# EAGLE board Purpletooth_Jamboree-Panel-v10 (EAGLE 6.5.0), part 1 of 2
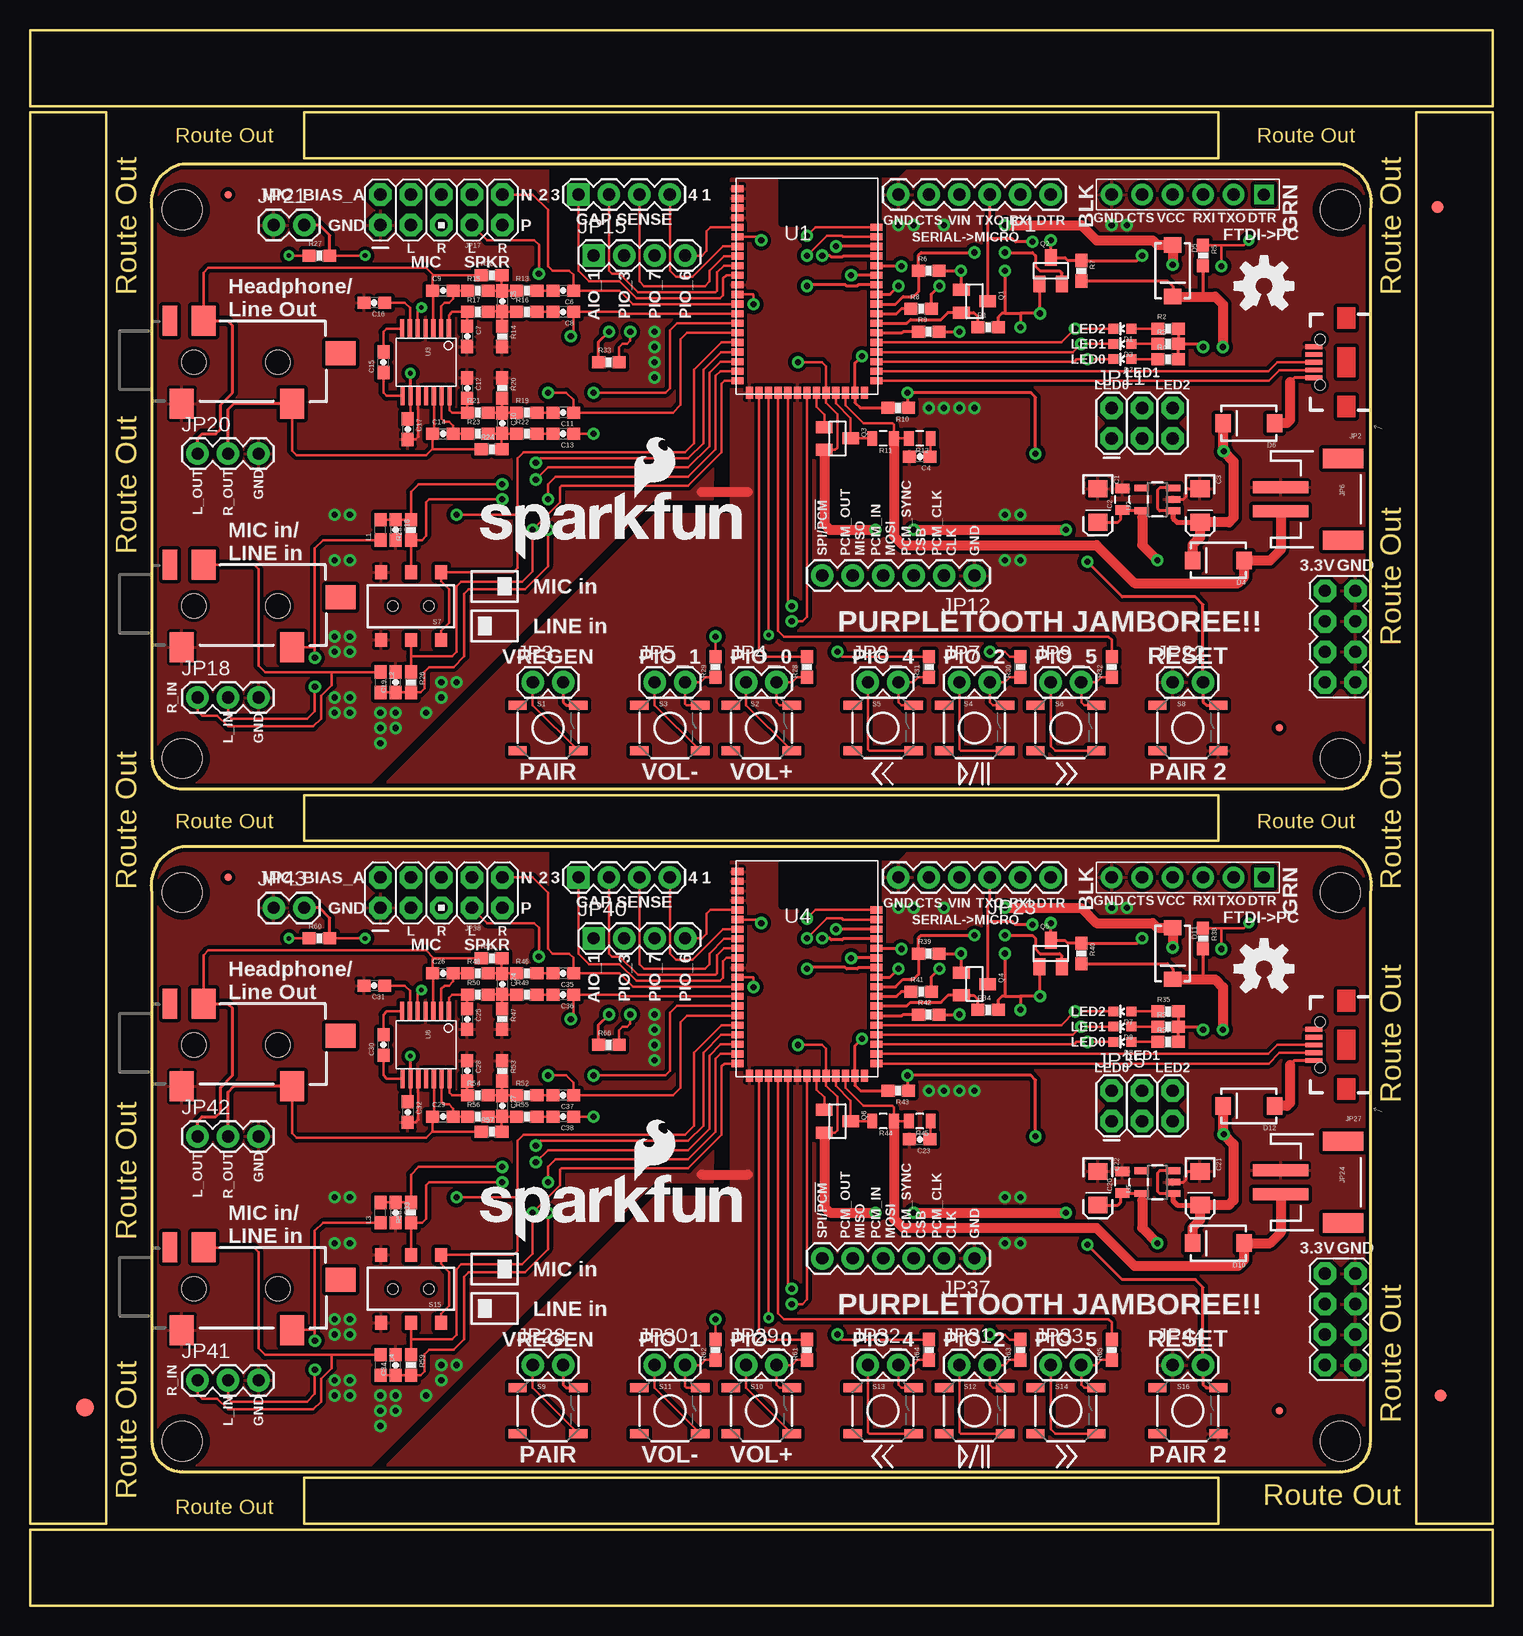
[diagram p0: board, top side]
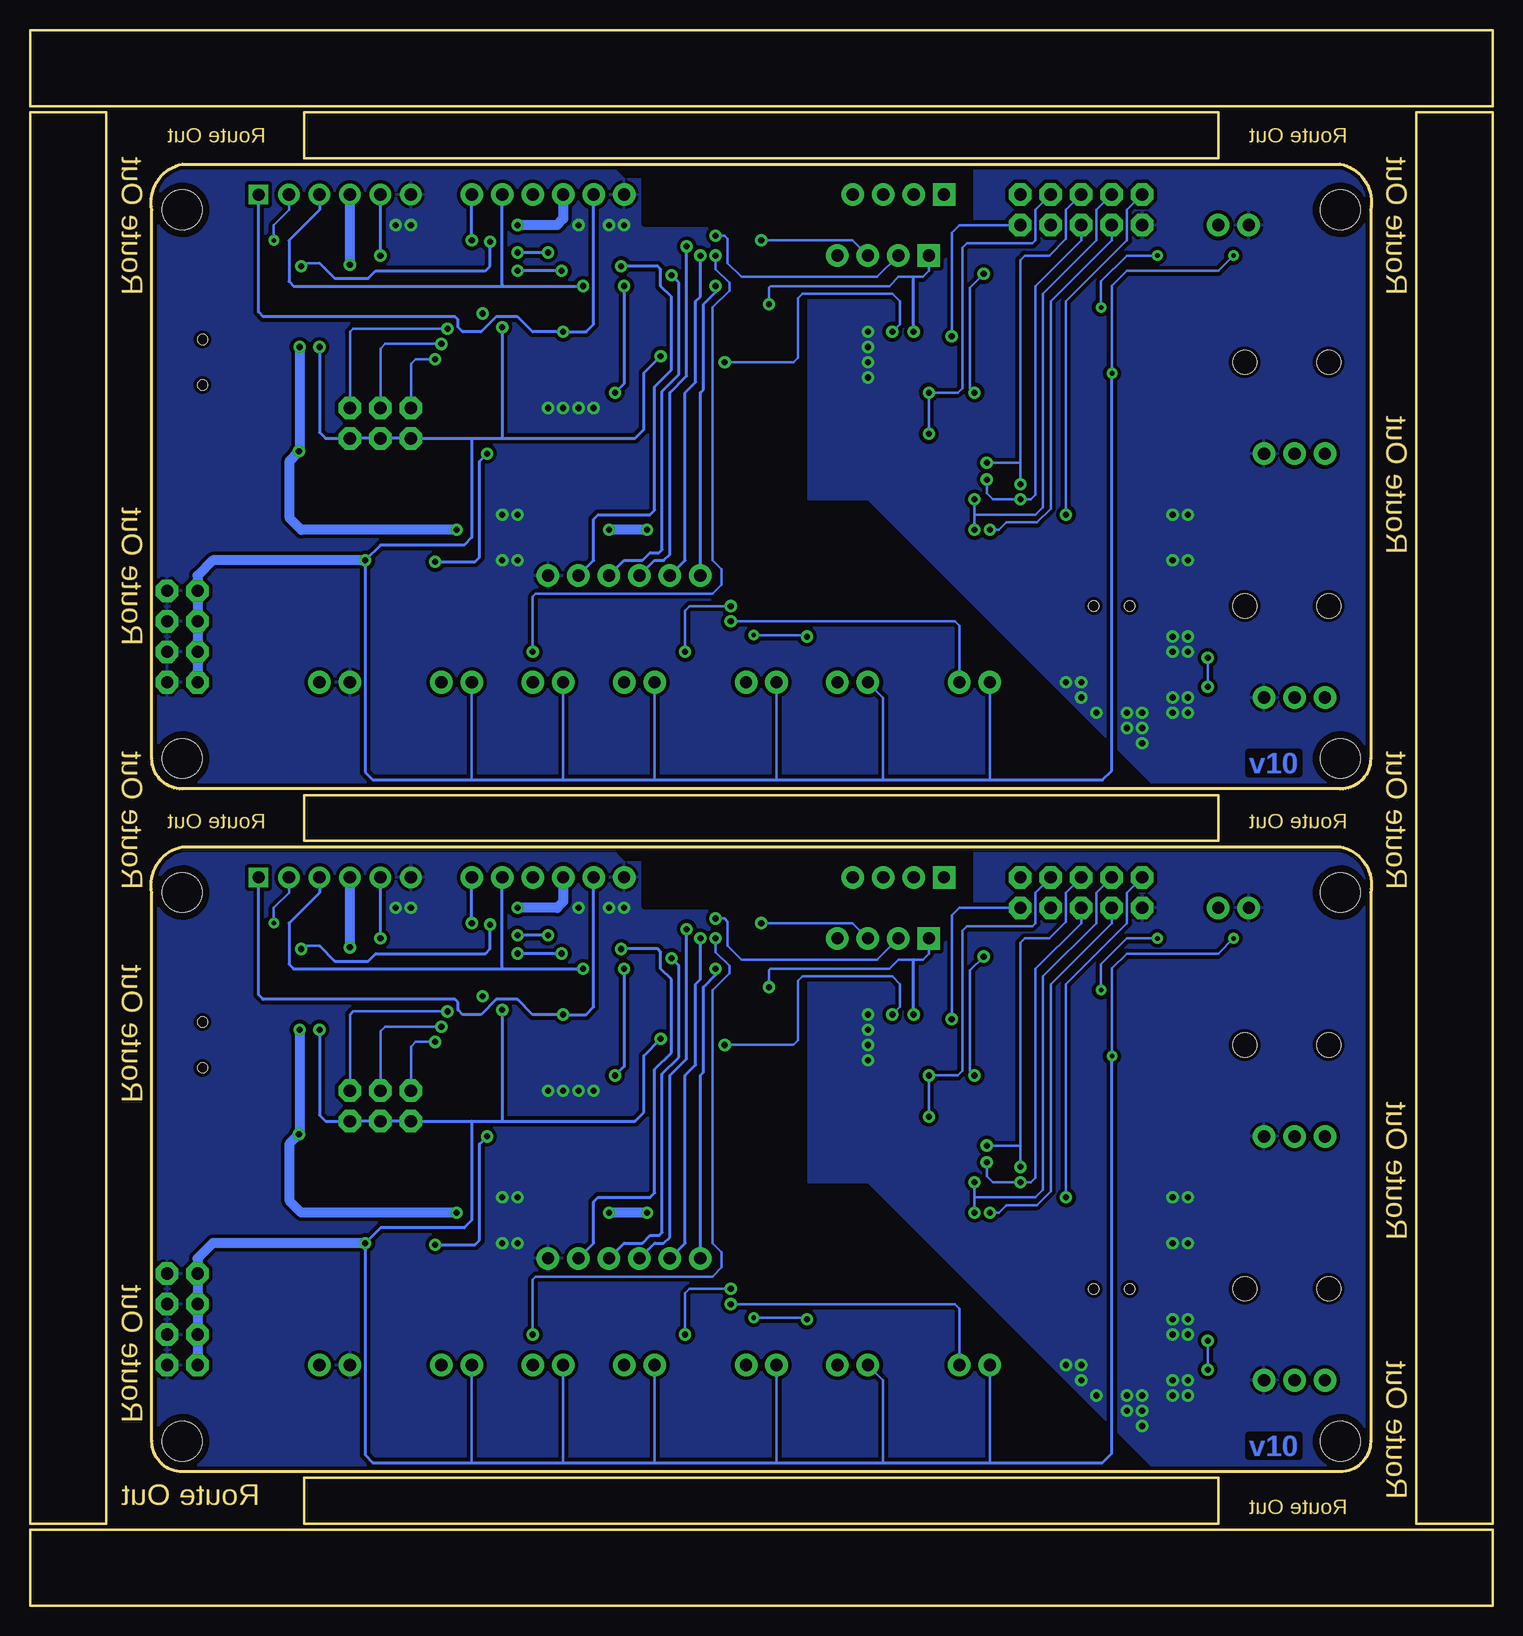
[diagram p1: board, bottom side, seen from below]

Size 121.92 x 131.32 mm. Coordinates in mm from the lower left corner, seen from the top.
Outline: 99.06,10.67 22.86,10.67 22.86,6.86 99.06,6.86 99.06,10.67
Outline: 99.06,124.46 22.86,124.46 22.86,120.65 99.06,120.65 99.06,124.46
Outline: 99.06,67.56 22.86,67.56 22.86,63.75 99.06,63.75 99.06,67.56
Outline: 121.92,131.32 0,131.32 0,124.97 121.92,124.97 121.92,131.32
Outline: 121.92,6.35 0,6.35 0,0 121.92,0 121.92,6.35
Outline: 115.57,124.46 115.57,6.86 121.92,6.86 121.92,124.46 115.57,124.46
Outline: 0,124.46 0,6.86 6.35,6.86 6.35,124.46 0,124.46
Outline: 10.16,116.33 10.16,70.61 arc90 12.7,68.07 109.22,68.07 arc90 111.76,70.61 111.76,116.33 arc90 109.22,120.14 12.7,120.14 arc90 10.16,116.33
Outline: 10.16,59.44 10.16,13.72 arc90 12.7,11.18 109.22,11.18 arc90 111.76,13.72 111.76,59.44 arc90 109.22,63.25 12.7,63.25 arc90 10.16,59.44
Copper layers (1*16): Top 0.035mm / dielectric 1.5mm / Bottom 0.035mm
Design rules "Sparkfun *": minimum track width 8mil, minimum drill 20mil, track to track 8mil, track to pad 8mil, pad to pad 8mil, via to via 8mil, smd to smd 8mil, copper to edge 8mil, drill to drill 8mil, minimum pad ring 12mil, minimum via ring 10mil, stop-mask expansion 4mil, vias tented up to drill 20mil, thermal gap 10mil

## Footprints (pad centres in the part's own frame; a part is rotated, then mirrored left to right if it is on the bottom)
EIA3216 = smd 1.4 x 1.6: A 1.4,0; C -1.4,0
0805 = smd 0.8 x 1.2: 1 -0.9,0; 2 0.9,0
0603-CAP = smd 1.1 x 1: 1 -0.85,0; 2 0.85,0
LED-0603 = smd 0.8 x 0.8: A 0,-0.75; C 0,0.75
SMA-DIODE = smd 1.27 x 1.47: A -2.15,0; C 2.15,0
FIDUCIAL-1.5X3 = smd 1.5 x 1.5: 1 0,0
FIDUCIAL-1X2 = smd 1 x 1: 1 0,0
MICRO-FIDUCIAL = smd 0.635 x 0.635: 1 0,0
FTDI_BASIC = drill 1.016 pad 1.88: CTS 10.16,0; DTR 0,0; GND 12.7,0; RXI 2.54,0; TXO 5.08,0; VCC 7.62,0
USB-AB-MICRO-SMD_V03 = smd 1.4 x 0.4: D+1 2.7,0; D-1 2.7,0.65; GND1 2.7,-1.3; ID1 2.7,-0.65; VBUS1 2.7,1.3 | hole 0.85: 2.2,1.9; 2.2,-1.9
1X02 = drill 1.016 pad 1.88: 1 0,0; 2 2.54,0
JST-2-SMD = smd 1 x 4.6: 1 -1,-3.7; 2 1,-3.7 | smd 1.6 x 3.4: NC1 -3.4,1.5; NC2 3.4,1.5
1X04 = drill 1.016 pad 1.88 square: 1 0,0 | drill 1.016 pad 1.88: 2 2.54,0; 3 5.08,0; 4 7.62,0
2X3 = drill 1.016 pad 1.88 octagon: 1 0,0; 2 0,2.54; 3 2.54,0; 4 2.54,2.54; 5 5.08,0; 6 5.08,2.54
1X06 = drill 1.016 pad 1.88: 1 0,0; 2 2.54,0; 3 5.08,0; 4 7.62,0; 5 10.16,0; 6 12.7,0
AUDIO-JACK-3.5MM-SMD = smd 2 x 2.5: RING 4.3,3.45; SLEEVE 2.5,-3.45; TIP 11.7,-3.45 | smd 1.2 x 2.5: RSH 1.5,3.45 | smd 2.5 x 2: TSH 15.75,0.75 | hole 2: 3.5,0; 10.5,0
2X4 = drill 1.016 pad 1.88 octagon: 1 -3.81,-1.27; 2 -3.81,1.27; 3 -1.27,-1.27; 4 -1.27,1.27; 5 1.27,-1.27; 6 1.27,1.27; 7 3.81,-1.27; 8 3.81,1.27
AVR_ICSP = drill 1.016 pad 1.88 octagon: 1 -1.27,5.08; 2 1.27,5.08; 3 -1.27,2.54; 4 1.27,2.54; 5 -1.27,0; 6 1.27,0; 7 -1.27,-2.54; 8 1.27,-2.54; 9 -1.27,-5.08; 10 1.27,-5.08
1X03 = drill 1.016 pad 1.88: 1 0,0; 2 2.54,0; 3 5.08,0
FTDI_DEVICE_SIDE = drill 1 square: P$1 -6.35,0 | drill 1.016 pad 1.778: P$2 -3.81,0; P$3 -1.27,0; P$4 1.27,0; P$5 3.81,0; P$6 6.35,0
0603 = smd 1.1 x 1: 1 -0.85,0; 2 0.85,0
SOT23 = smd 1 x 1.4: 1 -0.95,-1.1; 2 0.95,-1.1; 3 0,1.1
0603-RES = smd 1.1 x 1: 1 -0.85,0; 2 0.85,0
TACTILE_SWITCH_SMD = smd 1.524 x 0.762: 1 -2.54,1.905; 2 2.54,1.905; 3 -2.54,-1.905; 4 2.54,-1.905
AYZ0202 = smd 1 x 1.15: 1 -2.5,2.825; 2 0,2.825; 3 2.5,2.825; 4 -2.5,-2.825; 5 0,-2.825; 6 2.5,-2.825 | hole 0.85: 1.5,0; -1.5,0
STAND-OFF = hole 3.302: 0,0
BC127_XTRA_PASTE = smd 1 x 0.6: 1 -5.8,8.1; 2 -5.8,7.3; 3 -5.8,6.5; 4 -5.8,5.7; 5 -5.8,4.9; 6 -5.8,4.1; 7 -5.8,3.3; 8 -5.8,2.5; 9 -5.8,1.7; 10 -5.8,0.9; 11 -5.8,0.1; 12 -5.8,-0.7; 13 -5.8,-1.5; 14 -5.8,-2.3; 15 -5.8,-3.1; 16 -5.8,-3.9; 17 -5.8,-4.7; 18 -5.8,-5.5; 19 -5.8,-6.3; 20 -5.8,-7.1; 21 -5.8,-7.9; 35 5.8,-7.9; 36 5.8,-7.1; 37 5.8,-6.3; 38 5.8,-5.5; 39 5.8,-4.7; 40 5.8,-3.9; 41 5.8,-3.1; 42 5.8,-2.3; 43 5.8,-1.5; 44 5.8,-0.7; 45 5.8,0.1; 46 5.8,0.9; 47 5.8,1.7; 48 5.8,2.5; 49 5.8,3.3; 50 5.8,4.1; 51 5.8,4.9 | smd 0.6 x 1: 22 -4.8,-8.9; 23 -4,-8.9; 24 -3.2,-8.9; 25 -2.4,-8.9; 26 -1.6,-8.9; 27 -0.8,-8.9; 28 0,-8.9; 29 0.8,-8.9; 30 1.6,-8.9; 31 2.4,-8.9; 32 3.2,-8.9; 33 4,-8.9; 34 4.8,-8.9
SOT23-5 = smd 0.55 x 1.2: 1 -0.95,-1.3; 2 0,-1.3; 3 0.95,-1.3; 4 0.95,1.3; 5 -0.95,1.3
TSSOP-14 = smd 1.6 x 0.35: 1 -2.8,1.9; 2 -2.8,1.25; 3 -2.8,0.6; 4 -2.8,-0.05; 5 -2.8,-0.7; 6 -2.8,-1.35; 7 -2.8,-2; 8 2.8,-1.95; 9 2.8,-1.3; 10 2.8,-0.65; 11 2.8,0; 12 2.8,0.65; 13 2.8,1.3; 14 2.8,1.95

## Placement (x,y rotation side)
C1  10uF  [EIA3216]  89.03,91.69 270 top
C2  1uF  [0805]  91.06,92.2 90 top
C3  10uF  [EIA3216]  97.54,91.69 270 top
C4  4.7uF  [0603-CAP]  74.17,95.76 180 top
C5  180pF  [0603-CAP]  39.37,108.71 270 top
C6  0.1uF  [0603-CAP]  44.45,109.6 180 top
C7  47pF  [0603-CAP]  36.45,105.79 270 top
C8  0.1uF  [0603-CAP]  44.45,107.82 180 top
C9  47pF  [0603-CAP]  34.42,109.6 0 top
C10  180pF  [0603-CAP]  39.37,98.55 270 top
C11  0.1uF  [0603-CAP]  44.45,99.44 180 top
C12  47pF  [0603-CAP]  36.45,101.47 270 top
C13  0.1uF  [0603-CAP]  44.45,97.66 180 top
C14  47pF  [0603-CAP]  34.42,97.66 0 top
C15  1.0uF  [0603-CAP]  29.46,103.63 90 top
C16  1.0uF  [0603-CAP]  28.7,108.58 180 top
C17  1.0uF  [0603-CAP]  31.5,98.04 270 top
C18  15pF  [0603-CAP]  30.48,89.66 270 top
C19  15pF  [0603-CAP]  30.48,76.96 90 top
C20  1uF  [0805]  91.06,35.31 90 top
C21  10uF  [EIA3216]  97.54,34.8 270 top
C22  10uF  [EIA3216]  89.03,34.8 270 top
C23  4.7uF  [0603-CAP]  74.17,38.86 180 top
C24  180pF  [0603-CAP]  39.37,51.82 270 top
C25  47pF  [0603-CAP]  36.45,48.9 270 top
C26  47pF  [0603-CAP]  34.42,52.7 0 top
C27  180pF  [0603-CAP]  39.37,41.66 270 top
C28  47pF  [0603-CAP]  36.45,44.58 270 top
C29  47pF  [0603-CAP]  34.42,40.77 0 top
C30  1.0uF  [0603-CAP]  29.46,46.74 90 top
C31  1.0uF  [0603-CAP]  28.7,51.69 180 top
C32  1.0uF  [0603-CAP]  31.5,41.15 270 top
C33  15pF  [0603-CAP]  30.48,32.77 270 top
C34  15pF  [0603-CAP]  30.48,20.07 90 top
C35  0.1uF  [0603-CAP]  44.45,52.7 180 top
C36  0.1uF  [0603-CAP]  44.45,50.93 180 top
C37  0.1uF  [0603-CAP]  44.45,42.55 180 top
C38  0.1uF  [0603-CAP]  44.45,40.77 180 top
D1  GREEN  [LED-0603]  91.06,106.43 90 top
D2  RED  [LED-0603]  91.06,103.89 90 top
D3  BLUE  [LED-0603]  91.06,105.16 90 top
D4  BA340A  [SMA-DIODE]  99.06,87.12 180 top
D5  BA340A  [SMA-DIODE]  95.25,111.25 270 top
D6  BA340A  [SMA-DIODE]  101.6,98.55 180 top
D7  GREEN  [LED-0603]  91.06,49.53 90 top
D8  RED  [LED-0603]  91.06,46.99 90 top
D9  BLUE  [LED-0603]  91.06,48.26 90 top
D10  BA340A  [SMA-DIODE]  99.06,30.23 180 top
D11  BA340A  [SMA-DIODE]  95.25,54.36 270 top
D12  BA340A  [SMA-DIODE]  101.6,41.66 180 top
E$1  [FIDUCIAL-1.5X3]  4.57,16.51 0 top
E$13  [FIDUCIAL-1X2]  117.35,116.59 180 top
E$14  [FIDUCIAL-1X2]  117.6,17.53 0 top
FID1  FIDUCIALUFIDUCIAL  [MICRO-FIDUCIAL]  16.51,117.6 0 top
FID2  FIDUCIALUFIDUCIAL  [MICRO-FIDUCIAL]  104.14,73.15 0 top
FID3  FIDUCIALUFIDUCIAL  [MICRO-FIDUCIAL]  16.51,60.71 0 top
FID4  FIDUCIALUFIDUCIAL  [MICRO-FIDUCIAL]  104.14,16.26 0 top
JP1  FTDI_BASICPTH  [FTDI_BASIC]  85.09,117.6 180 top
JP2  [USB-AB-MICRO-SMD_V03]  109.73,103.63 180 top
JP3  M02PTH  [1X02]  41.91,76.96 0 top
JP4  M02PTH  [1X02]  59.69,76.96 0 top
JP5  M02PTH  [1X02]  52.07,76.96 0 top
JP6  M02-JST-2MM-SMT  [JST-2-SMD]  107.95,92.2 270 top
JP7  M02PTH  [1X02]  77.47,76.96 0 top
JP8  M02PTH  [1X02]  69.85,76.96 0 top
JP9  M02PTH  [1X02]  85.09,76.96 0 top
JP10  [1X04]  45.72,117.6 0 top
JP11  [2X3]  90.17,97.28 0 top
JP12  [1X06]  78.74,85.85 180 top
JP13  AUDIO-JACK2SMD  [AUDIO-JACK-3.5MM-SMD]  10.16,103.63 0 top
JP14  AUDIO-JACK2SMD  [AUDIO-JACK-3.5MM-SMD]  10.16,83.31 0 top
JP15  [1X04]  46.99,112.52 0 top
JP16  M04X2  [2X4]  109.22,80.77 270 top
JP17  M05X2PTH  [AVR_ICSP]  34.29,116.33 90 top
JP18  [1X03]  13.97,75.69 0 top
JP19  FTDI_DEVICE  [FTDI_DEVICE_SIDE]  96.52,117.6 180 top
JP20  [1X03]  13.97,96.01 0 top
JP21  M02PTH  [1X02]  20.32,115.06 0 top
JP22  M02PTH  [1X02]  95.25,76.96 0 top
JP23  FTDI_BASICPTH  [FTDI_BASIC]  85.09,60.71 180 top
JP24  M02-JST-2MM-SMT  [JST-2-SMD]  107.95,35.31 270 top
JP25  AUDIO-JACK2SMD  [AUDIO-JACK-3.5MM-SMD]  10.16,46.74 0 top
JP26  AUDIO-JACK2SMD  [AUDIO-JACK-3.5MM-SMD]  10.16,26.42 0 top
JP27  [USB-AB-MICRO-SMD_V03]  109.73,46.74 180 top
JP28  M02PTH  [1X02]  41.91,20.07 0 top
JP29  M02PTH  [1X02]  59.69,20.07 0 top
JP30  M02PTH  [1X02]  52.07,20.07 0 top
JP31  M02PTH  [1X02]  77.47,20.07 0 top
JP32  M02PTH  [1X02]  69.85,20.07 0 top
JP33  M02PTH  [1X02]  85.09,20.07 0 top
JP34  [1X04]  45.72,60.71 0 top
JP35  [2X3]  90.17,40.39 0 top
JP36  M04X2  [2X4]  109.22,23.88 270 top
JP37  [1X06]  78.74,28.96 180 top
JP38  M05X2PTH  [AVR_ICSP]  34.29,59.44 90 top
JP39  FTDI_DEVICE  [FTDI_DEVICE_SIDE]  96.52,60.71 180 top
JP40  [1X04]  46.99,55.63 0 top
JP41  [1X03]  13.97,18.8 0 top
JP42  [1X03]  13.97,39.12 0 top
JP43  M02PTH  [1X02]  20.32,58.17 0 top
JP44  M02PTH  [1X02]  95.25,20.07 0 top
L1  15nH  [0603]  29.21,89.66 90 top
L2  15nH  [0603]  29.21,76.96 270 top
L3  15nH  [0603]  29.21,32.77 90 top
L4  15nH  [0603]  29.21,20.07 270 top
LOGO1  OSHW-LOGOM  [OSHW-LOGO-M]  102.87,109.98 0 top
LOGO2  SFE_LOGO_NAME_FLAME.2_INCH  [SFE_LOGO_NAME_FLAME_.2]  36.83,87.12 0 top
LOGO3  OSHW-LOGOM  [OSHW-LOGO-M]  102.87,53.09 0 top
LOGO4  SFE_LOGO_NAME_FLAME.2_INCH  [SFE_LOGO_NAME_FLAME_.2]  36.83,30.23 0 top
Q1  MOSFET-NCHANNELBSS138  [SOT23]  78.74,108.71 270 top
Q2  MOSFET-NCHANNELBSS138  [SOT23]  85.09,111.25 0 top
Q3  MMBT4403  [SOT23]  67.31,97.28 270 top
Q4  MOSFET-NCHANNELBSS138  [SOT23]  78.74,51.82 270 top
Q5  MOSFET-NCHANNELBSS138  [SOT23]  85.09,54.36 0 top
Q6  MMBT4403  [SOT23]  67.31,40.39 270 top
R1  10K  [0603-RES]  79.88,106.55 0 top
R2  240  [0603-RES]  94.87,106.43 0 top
R3  240  [0603-RES]  94.87,105.16 0 top
R4  240  [0603-RES]  94.87,103.89 0 top
R5  10K  [0603-RES]  97.79,112.52 270 top
R6  10K  [0603-RES]  74.93,111.25 0 top
R7  10K  [0603-RES]  87.63,111.25 270 top
R8  10K  [0603-RES]  74.3,108.08 0 top
R9  10K  [0603-RES]  74.93,106.17 0 top
R10  10K  [0603-RES]  72.39,99.82 180 top
R11  0.75  [0805]  71.12,97.28 180 top
R12  0.22  [0805]  74.17,97.28 180 top
R13  15K  [0603-RES]  41.4,109.6 0 top
R14  30.1k  [0603-RES]  39.37,105.79 270 top
R15  43k  [0603-RES]  37.34,109.6 0 top
R16  15K  [0603-RES]  41.4,107.82 0 top
R17  43k  [0603-RES]  37.34,107.82 0 top
R18  30.1k  [0603-RES]  38.48,110.87 0 top
R19  15K  [0603-RES]  41.4,99.44 0 top
R20  30.1k  [0603-RES]  39.37,101.47 270 top
R21  43k  [0603-RES]  37.34,99.44 0 top
R22  15K  [0603-RES]  41.4,97.66 0 top
R23  43k  [0603-RES]  37.34,97.66 0 top
R24  30.1k  [0603-RES]  38.48,96.39 0 top
R25  2.2k  [0603-RES]  31.75,89.66 90 top
R26  2.2k  [0603-RES]  31.75,76.96 270 top
R27  10K  [0603-RES]  24.13,112.52 0 top
R28  2.2k  [0603-RES]  64.77,78.23 90 top
R29  2.2k  [0603-RES]  57.15,78.23 90 top
R30  2.2k  [0603-RES]  82.55,78.23 90 top
R31  2.2k  [0603-RES]  74.93,78.23 90 top
R32  2.2k  [0603-RES]  90.17,78.23 90 top
R33  10K  [0603-RES]  48.26,103.63 0 top
R34  10K  [0603-RES]  79.88,49.66 0 top
R35  240  [0603-RES]  94.87,49.53 0 top
R36  240  [0603-RES]  94.87,48.26 0 top
R37  240  [0603-RES]  94.87,46.99 0 top
R38  10K  [0603-RES]  97.79,55.63 270 top
R39  10K  [0603-RES]  74.93,54.36 0 top
R40  10K  [0603-RES]  87.63,54.36 270 top
R41  10K  [0603-RES]  74.3,51.18 0 top
R42  10K  [0603-RES]  74.93,49.28 0 top
R43  10K  [0603-RES]  72.39,42.93 180 top
R44  0.75  [0805]  71.12,40.39 180 top
R45  0.22  [0805]  74.17,40.39 180 top
R46  15K  [0603-RES]  41.4,52.7 0 top
R47  30.1k  [0603-RES]  39.37,48.9 270 top
R48  43k  [0603-RES]  37.34,52.7 0 top
R49  15K  [0603-RES]  41.4,50.93 0 top
R50  43k  [0603-RES]  37.34,50.93 0 top
R51  30.1k  [0603-RES]  38.48,53.98 0 top
R52  15K  [0603-RES]  41.4,42.55 0 top
R53  30.1k  [0603-RES]  39.37,44.58 270 top
R54  43k  [0603-RES]  37.34,42.55 0 top
R55  15K  [0603-RES]  41.4,40.77 0 top
R56  43k  [0603-RES]  37.34,40.77 0 top
R57  30.1k  [0603-RES]  38.48,39.5 0 top
R58  2.2k  [0603-RES]  31.75,32.77 90 top
R59  2.2k  [0603-RES]  31.75,20.07 270 top
R60  10K  [0603-RES]  24.13,55.63 0 top
R61  2.2k  [0603-RES]  64.77,21.34 90 top
R62  2.2k  [0603-RES]  57.15,21.34 90 top
R63  2.2k  [0603-RES]  82.55,21.34 90 top
R64  2.2k  [0603-RES]  74.93,21.34 90 top
R65  2.2k  [0603-RES]  90.17,21.34 90 top
R66  10K  [0603-RES]  48.26,46.74 0 top
S1  [TACTILE_SWITCH_SMD]  43.18,73.15 0 top
S2  [TACTILE_SWITCH_SMD]  60.96,73.15 0 top
S3  [TACTILE_SWITCH_SMD]  53.34,73.15 0 top
S4  [TACTILE_SWITCH_SMD]  78.74,73.15 0 top
S5  [TACTILE_SWITCH_SMD]  71.12,73.15 0 top
S6  [TACTILE_SWITCH_SMD]  86.36,73.15 0 top
S7  DPDT  [AYZ0202]  31.75,83.31 180 top
S8  [TACTILE_SWITCH_SMD]  96.52,73.15 0 top
S9  [TACTILE_SWITCH_SMD]  43.18,16.26 0 top
S10  [TACTILE_SWITCH_SMD]  60.96,16.26 0 top
S11  [TACTILE_SWITCH_SMD]  53.34,16.26 0 top
S12  [TACTILE_SWITCH_SMD]  78.74,16.26 0 top
S13  [TACTILE_SWITCH_SMD]  71.12,16.26 0 top
S14  [TACTILE_SWITCH_SMD]  86.36,16.26 0 top
S15  DPDT  [AYZ0202]  31.75,26.42 180 top
S16  [TACTILE_SWITCH_SMD]  96.52,16.26 0 top
STANDOFF1  STAND-OFF  [STAND-OFF]  109.22,116.33 0 top
STANDOFF2  STAND-OFF  [STAND-OFF]  109.22,70.61 0 top
STANDOFF3  STAND-OFF  [STAND-OFF]  12.7,70.61 0 top
STANDOFF4  STAND-OFF  [STAND-OFF]  12.7,116.33 0 top
STANDOFF5  STAND-OFF  [STAND-OFF]  109.22,59.44 0 top
STANDOFF6  STAND-OFF  [STAND-OFF]  109.22,13.72 0 top
STANDOFF7  STAND-OFF  [STAND-OFF]  12.7,13.72 0 top
STANDOFF8  STAND-OFF  [STAND-OFF]  12.7,59.44 0 top
U1  [BC127_XTRA_PASTE]  64.77,109.98 0 top
U2  MIC5219 3.3V  [SOT23-5]  93.98,92.2 90 top
U3  TPA6138A2  [TSSOP-14]  33.02,103.63 270 top
U4  [BC127_XTRA_PASTE]  64.77,53.09 0 top
U5  MIC5219 3.3V  [SOT23-5]  93.98,35.31 90 top
U6  TPA6138A2  [TSSOP-14]  33.02,46.74 270 top

## Library data of the parts
C1 C3 C21 C22 = SparkFun-Capacitors; PROD_ID: CAP-00811
C2 C20 = SparkFun-Capacitors; PROD_ID: CAP-08064
C4 C23 = SparkFun-Capacitors; PROD_ID: CAP-08280
C5 C10 C24 C27 = SparkFun-Capacitors; DIST: Digikey; DIST_ID: 1276-1255-2-ND
C6 C8 C11 C13 C35-C38 = SparkFun-Capacitors; PROD_ID: CAP-08604
C7 C9 C12 C14 C25 C26 C28 C29 = SparkFun-Capacitors; PROD_ID: CAP-08913
C15-C17 C30-C32 = SparkFun-Capacitors; PROD_ID: CAP-00868
C18 C19 C33 C34 = SparkFun-Capacitors; PROD_ID: CAP-07881
D1 D7 = SparkFun-LED; PROD_ID: DIO-00821
D2 D8 = SparkFun-LED; PROD_ID: DIO-00819
D3 D9 = SparkFun-LED; PROD_ID: DIO-08575
D4-D6 D10-D12 = SparkFun-DiscreteSemi; PROD_ID: DIO-09886
E$1 E$13 E$14 FID1-FID4 LOGO1-LOGO4 = SparkFun-Aesthetics
JP1 JP3-JP5 JP7-JP12 JP15-JP23 JP28-JP44 = SparkFun-Connectors
JP2 JP27 = SparkFun-Connectors; PROD_ID: CONN-11794
JP6 JP24 = SparkFun-Connectors; PROD_ID: CONN-08352
JP13 JP14 JP25 JP26 = SparkFun-Connectors; PROD_ID: CONN-10353
L1-L4 = SparkFun-Passives; DIST: DIGIKEY; DIST_ID: 535-11527-1-ND
Q1 Q2 Q4 Q5 = SparkFun-DiscreteSemi; PROD_ID: TRANS-00830
Q3 Q6 = SparkFun-DiscreteSemi; PROD_ID: TRANS-09245
R1 R5-R10 R27 R33 R34 R38-R43 R60 R66 = SparkFun-Resistors; PROD_ID: RES-00824
R2-R4 R35-R37 = SparkFun-Resistors; PROD_ID: RES-07849
R11 R44 = SparkFun-Resistors; PROD_ID: RES-08474
R12 R45 = SparkFun-Resistors; PROD_ID: RES-09883
R13 R16 R19 R22 R46 R49 R52 R55 = SparkFun-Resistors; PROD_ID: RES-07854
R14 R18 R20 R24 R47 R51 R53 R57 = SparkFun-Resistors; PROD_ID: RES-08595
R15 R17 R21 R23 R48 R50 R54 R56 = SparkFun-Resistors; PROD_ID: RES-07858
R25 R26 R28-R32 R58 R59 R61-R65 = SparkFun-Resistors; PROD_ID: RES-08272
S1-S6 S8-S14 S16 = SparkFun-Electromechanical; PROD_ID: SWCH-08247
S7 S15 = SparkFun-Electromechanical; PROD_ID: SWCH-08179
STANDOFF1-STANDOFF8 = SparkFun-Electromechanical
U1 U4 = SparkFun-RF
U2 U5 = SparkFun-PowerIC; PROD_ID: VREG-09872
U3 U6 = SparkFun-AnalogIC; PROD_ID: IC-11779

## Nets
3.3V: C1.A C2.1 C17.1 JP3.1 JP4.1 JP5.1 JP7.1 JP8.1 JP9.1 JP11.1 JP11.3 JP11.5 JP16.1 JP16.3 JP16.5 JP16.7 Q1.1 Q2.1 R1.2 R2.2 R3.2 R4.2 R6.2 R10.2 R27.1 S1.4 S2.4 S3.4 S4.4 S5.4 S6.4 U1.33 U2.5 U3.9
3.3V1: C20.1 C22.A C32.1 JP28.1 JP29.1 JP30.1 JP31.1 JP32.1 JP33.1 JP35.1 JP35.3 JP35.5 JP36.1 JP36.3 JP36.5 JP36.7 Q4.1 Q5.1 R34.2 R35.2 R36.2 R37.2 R39.2 R43.2 R60.1 S9.4 S10.4 S11.4 S12.4 S13.4 S14.4 U4.33 U5.5 U6.9
5V_CTS: JP1.CTS JP19.P$1 R9.2
5V_CTS1: JP23.CTS JP39.P$1 R42.2
5V_RTS: JP1.DTR JP19.P$5 Q2.3 R7.1
5V_RTS1: JP23.DTR JP39.P$5 Q5.3 R40.1
5V_RX: JP1.RXI JP19.P$3 R8.2
5V_RX1: JP23.RXI JP39.P$3 R41.2
5V_TX: JP1.TXO JP19.P$2 Q1.3 R5.1
5V_TX1: JP23.TXO JP39.P$2 Q4.3 R38.1
!RESET: JP22.2 R10.1 S8.2 U1.44
!RESET1: JP44.2 R43.1 S16.2 U4.44
AIO_1: JP15.1 R33.1 U1.12
AIO_2: JP40.1 R66.1 U4.12
CAP_SENSE-1: JP34.3 U4.8
CAP_SENSE-4: JP10.3 U1.8
CAP_SENSE_1: JP10.4 U1.7
CAP_SENSE_2: JP10.1 U1.10
CAP_SENSE_3: JP10.2 U1.9
CAP_SENSE_4: JP34.2 U4.9
CAP_SENSE_5: JP34.4 U4.7
CAP_SENSE_6: JP34.1 U4.10
CHG_EXT: Q3.1 U1.29
CHG_EXT1: Q6.1 U4.29
CTS: R9.1 U1.40
CTS1: R42.1 U4.40
GND: C1.C C2.2 C3.C C4.2 C7.2 C12.1 C16.2 C17.2 C18.2 C19.2 JP1.GND JP2.GND1 JP6.1 JP12.1 JP13.SLEEVE JP14.SLEEVE JP16.2 JP16.4 JP16.6 JP16.8 JP17.1 JP18.3 JP19.P$6 JP20.3 JP21.1 JP22.1 R14.2 R20.1 S7.3 S7.6 S8.4 U1.1 U1.2 U1.3 U1.4 U1.11 U1.22 U1.27 U2.2 U3.4 U3.10
GND1: C20.2 C21.C C22.C C23.2 C25.2 C28.1 C31.2 C32.2 C33.2 C34.2 JP23.GND JP24.1 JP25.SLEEVE JP26.SLEEVE JP27.GND1 JP36.2 JP36.4 JP36.6 JP36.8 JP37.1 JP38.1 JP39.P$6 JP41.3 JP42.3 JP43.1 JP44.1 R47.2 R53.1 S15.3 S15.6 S16.4 U4.1 U4.2 U4.3 U4.4 U4.11 U4.22 U4.27 U5.2 U6.4 U6.10
L_IN: JP14.RING JP18.1 L2.1
L_IN1: JP26.RING JP41.1 L4.1
L_OUT: C9.1 JP13.RING JP20.1 R18.1 U3.3
L_OUT1: C26.1 JP25.RING JP42.1 R51.1 U6.3
LED_0: D2.C JP11.2 U1.37
LED_1: D3.C JP11.4 U1.38
LED_2: D1.C JP11.6 U1.39
LED_3: D7.C JP35.6 U4.39
LED_4: D9.C JP35.4 U4.38
LED_5: D8.C JP35.2 U4.37
MIC_BIAS_A: JP17.2 S7.1 S7.4 U1.17
MIC_BIAS_A1: JP38.2 S15.1 S15.4 U4.17
MIC_LN: C19.1 JP17.4 L2.2 R26.2 U1.20
MIC_LN1: C34.1 JP38.4 L4.2 R59.2 U4.20
MIC_LP: JP17.3 R26.1 S7.2 U1.21
MIC_LP1: JP38.3 R59.1 S15.2 U4.21
MIC_RN: C18.1 JP17.6 L1.2 R25.2 U1.18
MIC_RN1: C33.1 JP38.6 L3.2 R58.2 U4.18
MIC_RP: JP17.5 R25.1 S7.5 U1.19
MIC_RP1: JP38.5 R58.1 S15.5 U4.19
N$1: JP21.2 R27.2 U3.5
N$2: D3.A R3.1
N$3: D9.A R36.1
N$4: C8.2 R16.2
N$5: C6.2 R13.2
N$6: D2.A R4.1
N$7: D1.A R2.1
N$8: C5.1 R13.1 R15.2 R18.2
N$9: C9.2 R15.1 U3.2
N$10: JP4.2 R28.1 S2.2
N$11: JP5.2 R29.1 S3.2
N$12: C7.1 R17.1 U3.1
N$13: C5.2 R14.1 R16.1 R17.2
N$14: JP7.2 R30.1 S4.2
N$15: JP8.2 R31.1 S5.2
N$16: C10.1 R19.1 R20.2 R21.2
N$17: C12.2 R21.1 U3.14
N$18: C11.2 R19.2
N$19: C10.2 R22.1 R23.2 R24.2
N$20: C13.2 R22.2
N$21: C14.2 R23.1 U3.13
N$22: JP9.2 R32.1 S6.2
N$23: D8.A R37.1
N$24: C16.1 U3.6
N$25: C15.2 U3.7
N$26: C15.1 U3.8
N$27: D7.A R35.1
N$28: C4.1 R12.1
N$29: C23.1 R45.1
N$30: C36.2 R49.2
N$31: C35.2 R46.2
N$32: C24.1 R46.1 R48.2 R51.2
N$33: C26.2 R48.1 U6.2
N$34: C25.1 R50.1 U6.1
N$35: C24.2 R47.1 R49.1 R50.2
N$36: C27.1 R52.1 R53.2 R54.2
N$37: C28.2 R54.1 U6.14
N$38: C37.2 R52.2
N$39: C27.2 R55.1 R56.2 R57.2
N$40: C38.2 R55.2
N$41: C29.2 R56.1 U6.13
N$42: C31.1 U6.6
N$43: C30.2 U6.7
N$44: C30.1 U6.8
N$45: JP43.2 R60.2 U6.5
N$46: JP29.2 R61.1 S10.2
N$47: JP30.2 R62.1 S11.2
N$48: JP31.2 R63.1 S12.2
N$49: JP32.2 R64.1 S13.2
N$50: JP33.2 R65.1 S14.2
PCM_CLK/CLK: JP12.2 U1.47
PCM_CLK/CLK1: JP37.2 U4.47
PCM_IN/MOSI: JP12.4 U1.49
PCM_IN/MOSI1: JP37.4 U4.49
PCM_OUT/MISO: JP12.5 U1.48
PCM_OUT/MISO1: JP37.5 U4.48
PCM_SYNC/CSB: JP12.3 U1.46
PCM_SYNC/CSB1: JP37.3 U4.46
PIO_0: R28.2 U1.23
PIO_1: R29.2 U1.24
PIO_2: R30.2 U1.50
PIO_3: JP15.2 U1.51
PIO_4: R31.2 U1.26
PIO_5: R32.2 U1.25
PIO_6: JP15.4 U1.5
PIO_7: JP15.3 U1.6
PIO_8: R61.2 U4.23
PIO_9: R65.2 U4.25
PIO_10: JP40.4 U4.5
PIO_11: JP40.3 U4.6
PIO_12: R64.2 U4.26
PIO_13: JP40.2 U4.51
PIO_14: R63.2 U4.50
PIO_15: R62.2 U4.24
R_IN: JP14.TIP JP18.2 L1.1
R_IN1: JP26.TIP JP41.2 L3.1
R_OUT: C14.1 JP13.TIP JP20.2 R24.1 U3.12
R_OUT1: C29.1 JP25.TIP JP42.2 R57.1 U6.12
RTS: Q2.2 R6.1 U1.43
RTS1: Q5.2 R39.1 U4.43
RX: R8.1 U1.42
RX1: R41.1 U4.42
SPI_!PCM: JP12.6 U1.45
SPI_!PCM1: JP37.6 U4.45
SPKR_LN: C6.1 JP17.10 U1.13
SPKR_LN1: C35.1 JP38.10 U4.13
SPKR_LP: C8.1 JP17.9 U1.14
SPKR_LP1: C36.1 JP38.9 U4.14
SPKR_RN: C13.1 JP17.8 U1.15
SPKR_RN1: C38.1 JP38.8 U4.15
SPKR_RP: C11.1 JP17.7 U1.16
SPKR_RP1: C37.1 JP38.7 U4.16
TX: Q1.2 R1.1 U1.41
TX1: Q4.2 R34.1 U4.41
USB_N: JP2.D-1 U1.35
USB_N1: JP27.D-1 U4.35
USB_P: JP2.D+1 U1.36
USB_P1: JP27.D+1 U4.36
V_BAT: D4.A JP6.2 R11.1 R12.2 U1.32
V_BAT1: D10.A JP24.2 R44.1 R45.2 U4.32
V_FTDI: D5.A JP1.VCC JP19.P$4
V_FTDI1: D11.A JP23.VCC JP39.P$4
V_USB: D6.A JP2.VBUS1
V_USB1: D12.A JP27.VBUS1
VBAT_SENSE: Q3.3 R11.2 U1.31
VBAT_SENSE1: Q6.3 R44.2 U4.31
VIN: C3.A D4.C D5.C D6.C Q3.2 R5.2 R7.2 R33.2 U1.30 U2.1 U2.3
VIN1: C21.A D10.C D11.C D12.C Q6.2 R38.2 R40.2 R66.2 U4.30 U5.1 U5.3
VREGEN: JP3.2 S1.2 U1.28
VREGEN1: JP28.2 S9.2 U4.28